# Altium PCB PCB1.PcbDoc
Units mil, origin at the board's own origin, x right, y up, seen from the top; angles counter-clockwise.
Board outline 6000 x 4000 mil, 2 copper layers (Top Layer, Bottom Layer); 3 components, 9 nets, 43 pads, 0 vias.
Unrouted connection lines stored in the file: 5.
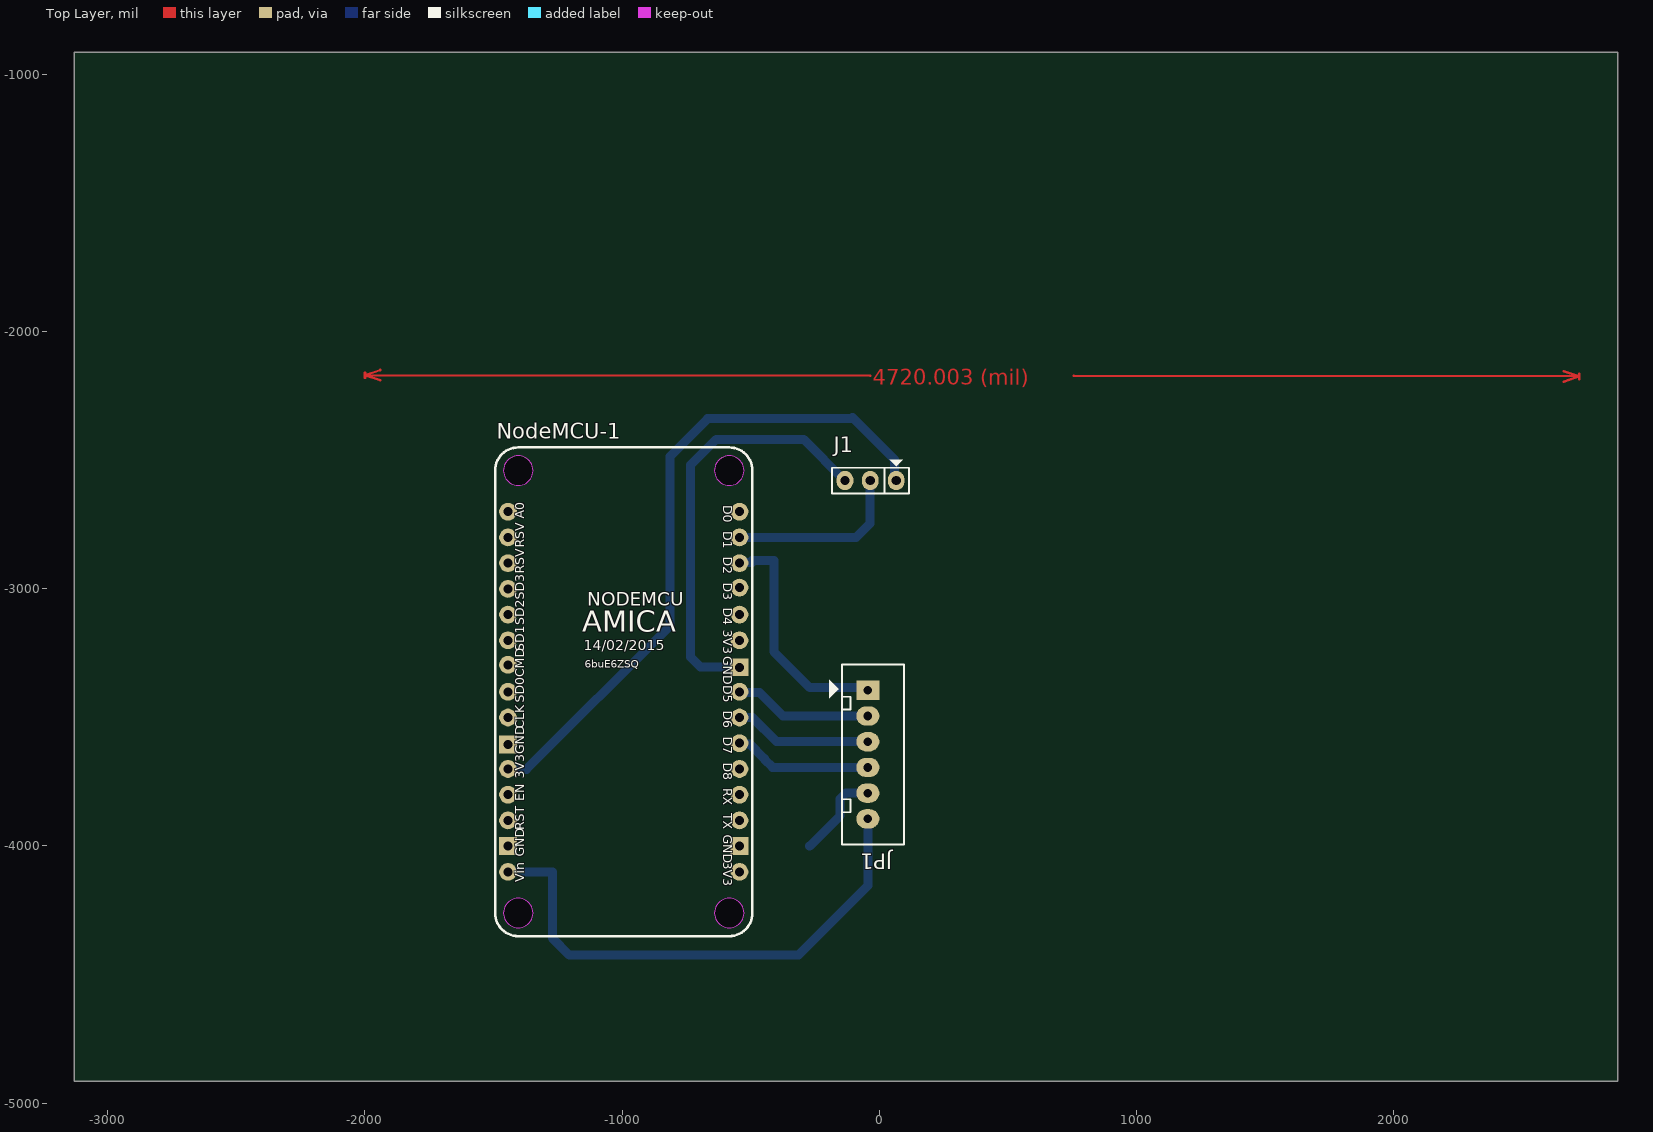
[diagram p0: Top Layer view]
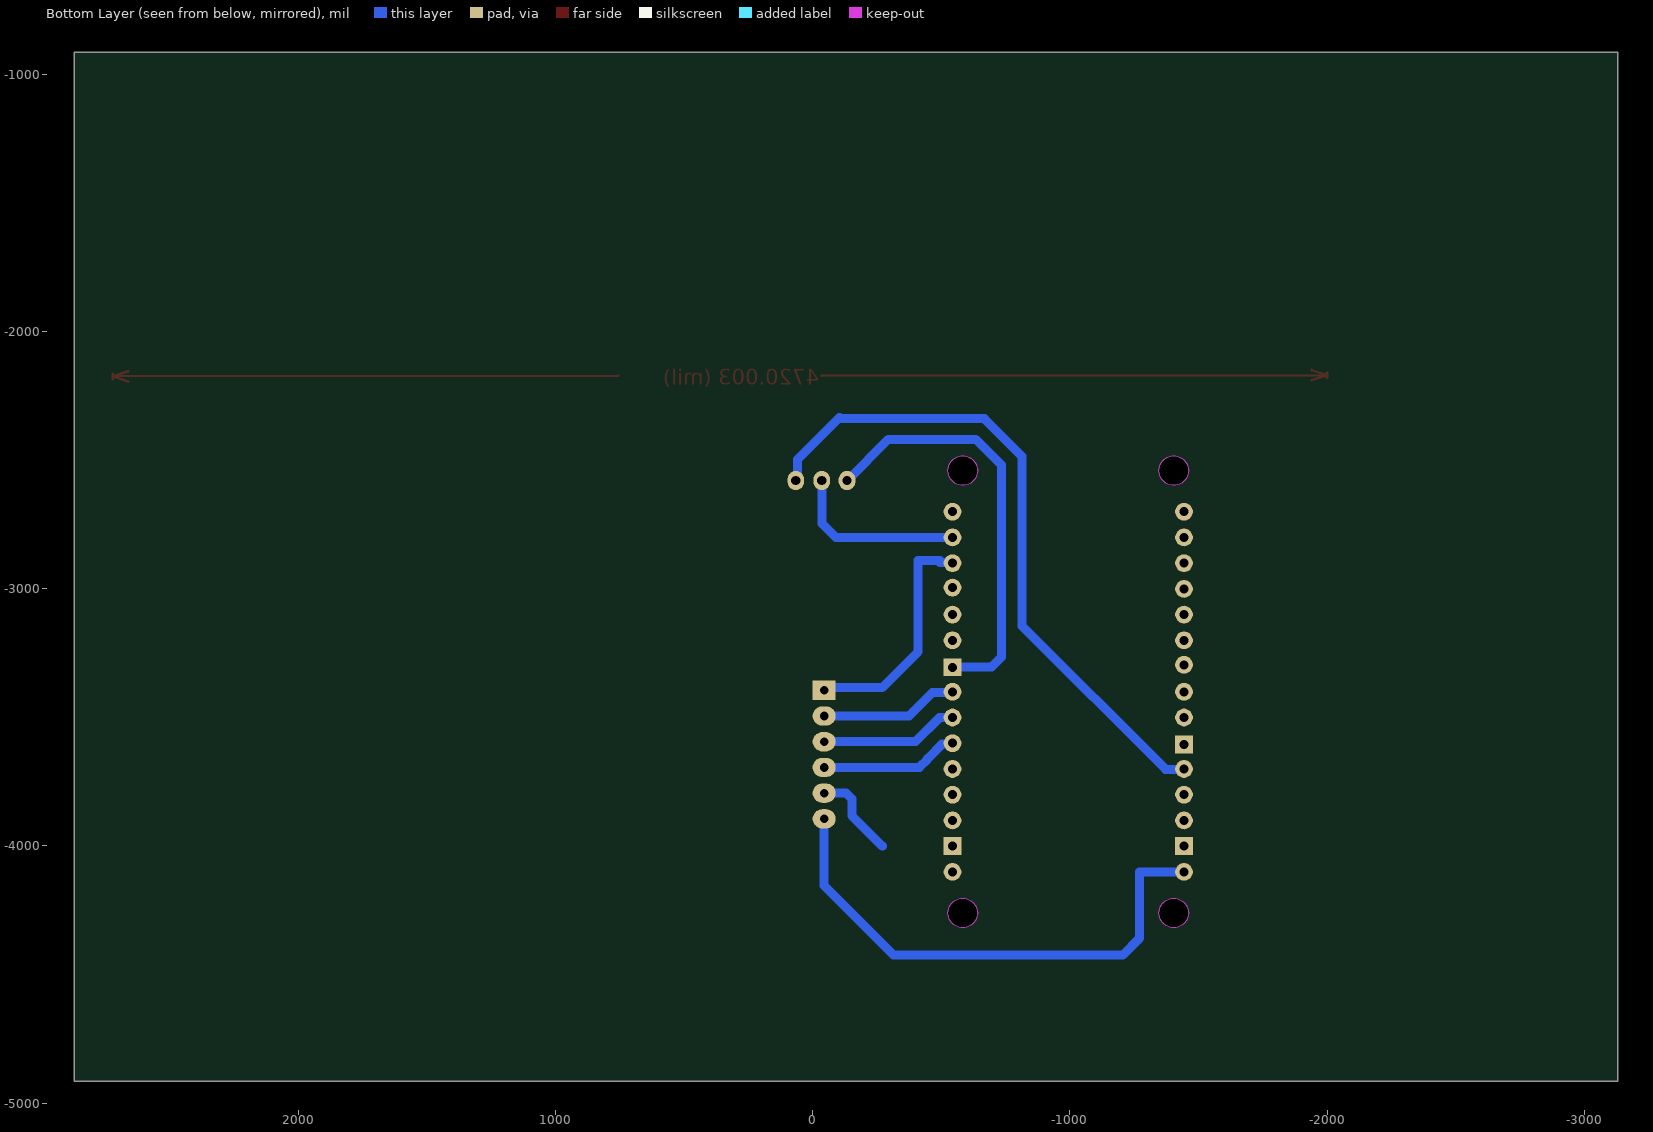
[diagram p1: Bottom Layer view, seen from below]

## Layer stack, top to bottom
Top Solder: solder mask 0.4, Solder Resist, Dk 3.5
Top Layer: signal copper 1.4
Dielectric 1: dielectric 12.6, FR-4, Dk 4.8
Bottom Layer: signal copper 1.4
Bottom Solder: solder mask 0.4, Solder Resist, Dk 3.5

## Board outline
-3130,-4915 2870,-4915 2870,-915 -3130,-915

## Design rules (kind name [scope] priority, off if disabled: settings)
Clearance [All] p1: gap=30
PolygonConnect [All] p1: connectstyle=Relief reliefconductorwidth=10 reliefentries=4 polygonreliefangle="90 Angle" airgapwidth=10
RoomDefinition Sheet1 [InComponentClass('Sheet1')] p1: confinementstyle=ConfineIn formatcopy=TRUE lockcomponents=FALSE outline 2949,-4819 4504,-4819 4504,-2794 2949,-2794
RoutingVias [All] p1: holewidth=28 width=50 viastyle="Through Hole" minholewidth=28 minwidth=50 maxholewidth=28 maxwidth=50
SolderMaskExpansion [All] p1: expansion=4
Width [All] p1: maxlimit=45 minlimit=35 preferedwidth=40
30 further rules are at their usual default settings.

## Components (designator, comment, footprint, x,y, rotation, side; value= is the part's Value field where it differs from the comment)
J1 "DHT" JP3 -35,-2580 r180 top
JP1 "Relay" CON6 -45,-3395 r270 top
NodeMCU-1 "NodeMCU V1.0 ESP-12E" "NodeMCU V1.0 ESP-12E" -1495,-2455 r0 top

## Footprints (in the part's own frame and the unit in brackets; to place one, negate y for a bottom-side part, rotate by r counter-clockwise, add the part's x,y. Pads: shape width x height; smd on the part's side, far side on the other; paste and mask are expansions set on the pad)
CON6 [mil] "CON6"
  rect 75x90 hole 34: 1(0,0)
  oval 75x90 hole 34: 2(100,0) 3(200,0) 4(300,0) 5(400,0) 6(500,0)
  silkscreen extent -100,-150 600,140
JP3 [mil] "Jumper 3"
  oval 65x75 hole 36: 1(-100,0) 2(1,0) 3(99,0)
  silkscreen extent -150,-81 150,50
"NodeMCU V1.0 ESP-12E" [mil]
  round 115 hole 115 unplated paste-300 mask-300: 0(91,-1806) 0(91,-86) 0(911,-1806) 0(911,-86)
  round 69 hole 35: 3V3(51,-1246) 3V3(951,-1646) 3V3(951,-746) A0(51,-246) CLK(51,-1046) CMD(51,-841) D0(951,-246) D1(951,-346) D2(951,-446) D3(951,-541) D4(951,-646) D5(951,-946) D6(951,-1046) D7(951,-1146) D8(951,-1246) EN(51,-1346) RST(51,-1446) RSV(51,-446) RSV(51,-346) RX(951,-1346) SD0(51,-946) SD1(51,-746) SD2(51,-646) SD3(51,-546) TX(951,-1446) VIN(51,-1646)
  rect 69x69 hole 35: GND(51,-1546) GND(51,-1151) GND(951,-1546) GND(951,-851)
  Keep-Out Layer circle w2: c911,-1806 r57.5
  Keep-Out Layer circle w2: c91,-1806 r57.5
  Keep-Out Layer circle w2: c911,-86 r57.5
  Keep-Out Layer circle w2: c91,-86 r57.5
  silkscreen extent 1,-1896 1001,4

## Part data
J1: library part JP3, "Jumper 3"
JP1: library part Con6, "Connector 6"
NodeMCU-1: "NodeMCU V1.0 ESP8266 (ESP-12E)"

## Nets (pads, with @x,y where several pads share a name; then routed paths per layer and width w, separated by ;. In a path a pad name is that pad's centre, name@x,y a point inside that pad or via, vN(x,y) a via of type N, cw(c..) or ccw(c..) an arc to the next point about the centre after c; other vN are vias at no path point)
NetJ1_1: J1.1 NodeMCU-1.3V3 | length 2607.3
  Bottom Layer w35: NodeMCU-1.3V3@-1444,-3703 -1372.46,-3703 -815,-3145.54 -815,-2486.92 -667.5,-2339.41 -108.7,-2339.41 -104.29,-2335 59,-2498.29 59,-2574 J1.1
NetJ1_2: J1.2 NodeMCU-1.D1 | length 696.8
  Bottom Layer w35: NodeMCU-1.D1 -91,-2801 -36,-2746 J1.2
NetJ1_3: J1.3 NodeMCU-1.GND | length 1661.3
  Bottom Layer w35: NodeMCU-1.GND@-544,-3304 -696,-3304 -735,-3265 -735,-2520.05 -634.36,-2419.41 -294.59,-2419.41 J1.3
NetJP1_1: JP1.1 NodeMCU-1.D2 | length 924.5
  Bottom Layer w35: NodeMCU-1.D2@-544,-2899 -543,-2898 -495.82,-2898 -495.82,-2890 -410,-2890 -410,-3245 -270,-3385 -55,-3385 JP1.1
NetJP1_2: JP1.2 NodeMCU-1.D5 | length 537.1
  Bottom Layer w35: NodeMCU-1.D5@-544,-3403 -467,-3403 -375,-3495 JP1.2
NetJP1_3: JP1.3 NodeMCU-1.D6 | length 537.9
  Bottom Layer w35: NodeMCU-1.D6 -493.68,-3501 -399.68,-3595 JP1.3
NetJP1_4: JP1.4 NodeMCU-1.D7 | length 539.2
  Bottom Layer w35: NodeMCU-1.D7 -541,-3604 -503.82,-3604 -447,-3660.82 -447,-3663 -415,-3695 JP1.4
NetJP1_5: JP1.5 | length 349.6
  Bottom Layer w35: -271,-4001 -152.5,-3882.5 -152.5,-3817.22 -130.28,-3795 JP1.5
NetJP1_6: JP1.6 NodeMCU-1.VIN | length 2056.2
  Bottom Layer w35: NodeMCU-1.VIN -1271,-4101 -1271,-4359 -1205,-4425 -315,-4425 -45,-4155 JP1.6
pads on no net: NodeMCU-1.0 NodeMCU-1.A0 NodeMCU-1.CLK NodeMCU-1.CMD NodeMCU-1.D0 NodeMCU-1.D3 NodeMCU-1.D4 NodeMCU-1.D8 NodeMCU-1.EN NodeMCU-1.RST NodeMCU-1.RSV NodeMCU-1.RX NodeMCU-1.SD0 NodeMCU-1.SD1 NodeMCU-1.SD2 NodeMCU-1.SD3 NodeMCU-1.TX
copper on no net: | length 4221.2
  Top Layer w10: -2000.01,-2180 -1999.99,-2160 ; -1940.02,-2190.06 -2000,-2170 ; -1939.98,-2150.06 -2000,-2170 ; -35.88,-2172.08 -2000,-2170 ; 755.88,-2172.92 2720,-2175 ; 2659.98,-2194.94 2720,-2175 ; 2660.02,-2154.94 2720,-2175 ; 2719.99,-2185 2720.01,-2165

## Other copper
Top Layer:
  text "4720.003 (mil)" at -25.91,-2208.08 h60 r359.94

## Text inside footprints (layer, text, board x,y; h text height)
NodeMCU-1: Top Overlay "14/02/2015" at -1150,-3253 h69; Top Overlay "AMICA" at -1156,-3194 h140; Top Overlay "NODEMCU" at -1135,-3084 h90; Top Overlay "6buE6ZSQ" at -1146,-3308 h30; Top Overlay "CLK" at -1369,-3545 h60 r90; Top Overlay "SD0" at -1369,-3444.57 h60 r90; Top Overlay "SD1" at -1369,-3243.71 h60 r90; Top Overlay "SD2" at -1369,-3143.29 h60 r90; Top Overlay "SD3" at -1369,-3042.86 h60 r90; Top Overlay "RSV" at -1369,-2942.43 h60 r90; Top Overlay "RSV" at -1369,-2842 h60 r90; Top Overlay "A0" at -1369,-2728 h60 r90; Top Overlay "D5" at -619,-3376 h60 r270; Top Overlay "GND" at -619,-3262 h60 r270; Top Overlay "3V3" at -619,-3160.01 h60 r270; Top Overlay "D4" at -619,-3075 h60 r270; Top Overlay "D3" at -619,-2976.58 h60 r270; Top Overlay "D2" at -619,-2876.58 h60 r270; Top Overlay "D1" at -619,-2776.35 h60 r270; Top Overlay "D0" at -619,-2675 h60 r270; Top Overlay "CMD" at -1369,-3344.14 h60 r90; Top Overlay "D6" at -619,-3475.12 h60 r270; Top Overlay "3V3" at -619,-4061 h60 r270; Top Overlay "GND" at -619,-3957.2 h60 r270; Top Overlay "TX" at -619,-3874 h60 r270; Top Overlay "RX" at -619,-3775.06 h60 r270; Top Overlay "D8" at -619,-3676.11 h60 r270; Top Overlay "D7" at -619,-3576.23 h60 r270; Top Overlay "Vin" at -1369,-4142 h60 r90; Top Overlay "GND" at -1369,-4042 h60 r90; Top Overlay "RST" at -1369,-3939 h60 r90; Top Overlay "EN" at -1369,-3827 h60 r90; Top Overlay "3V3" at -1369,-3740 h60 r90; Top Overlay "GND" at -1369,-3643 h60 r90